# Altium PCB DC_buck_3.3V.PcbDoc
Units mil, origin at the board's own origin, x right, y up, seen from the top; angles counter-clockwise.
Board outline 2455 x 1905 mil, 2 copper layers (Top Layer, Bottom Layer); 36 components, 21 nets, 90 pads, 160 vias.
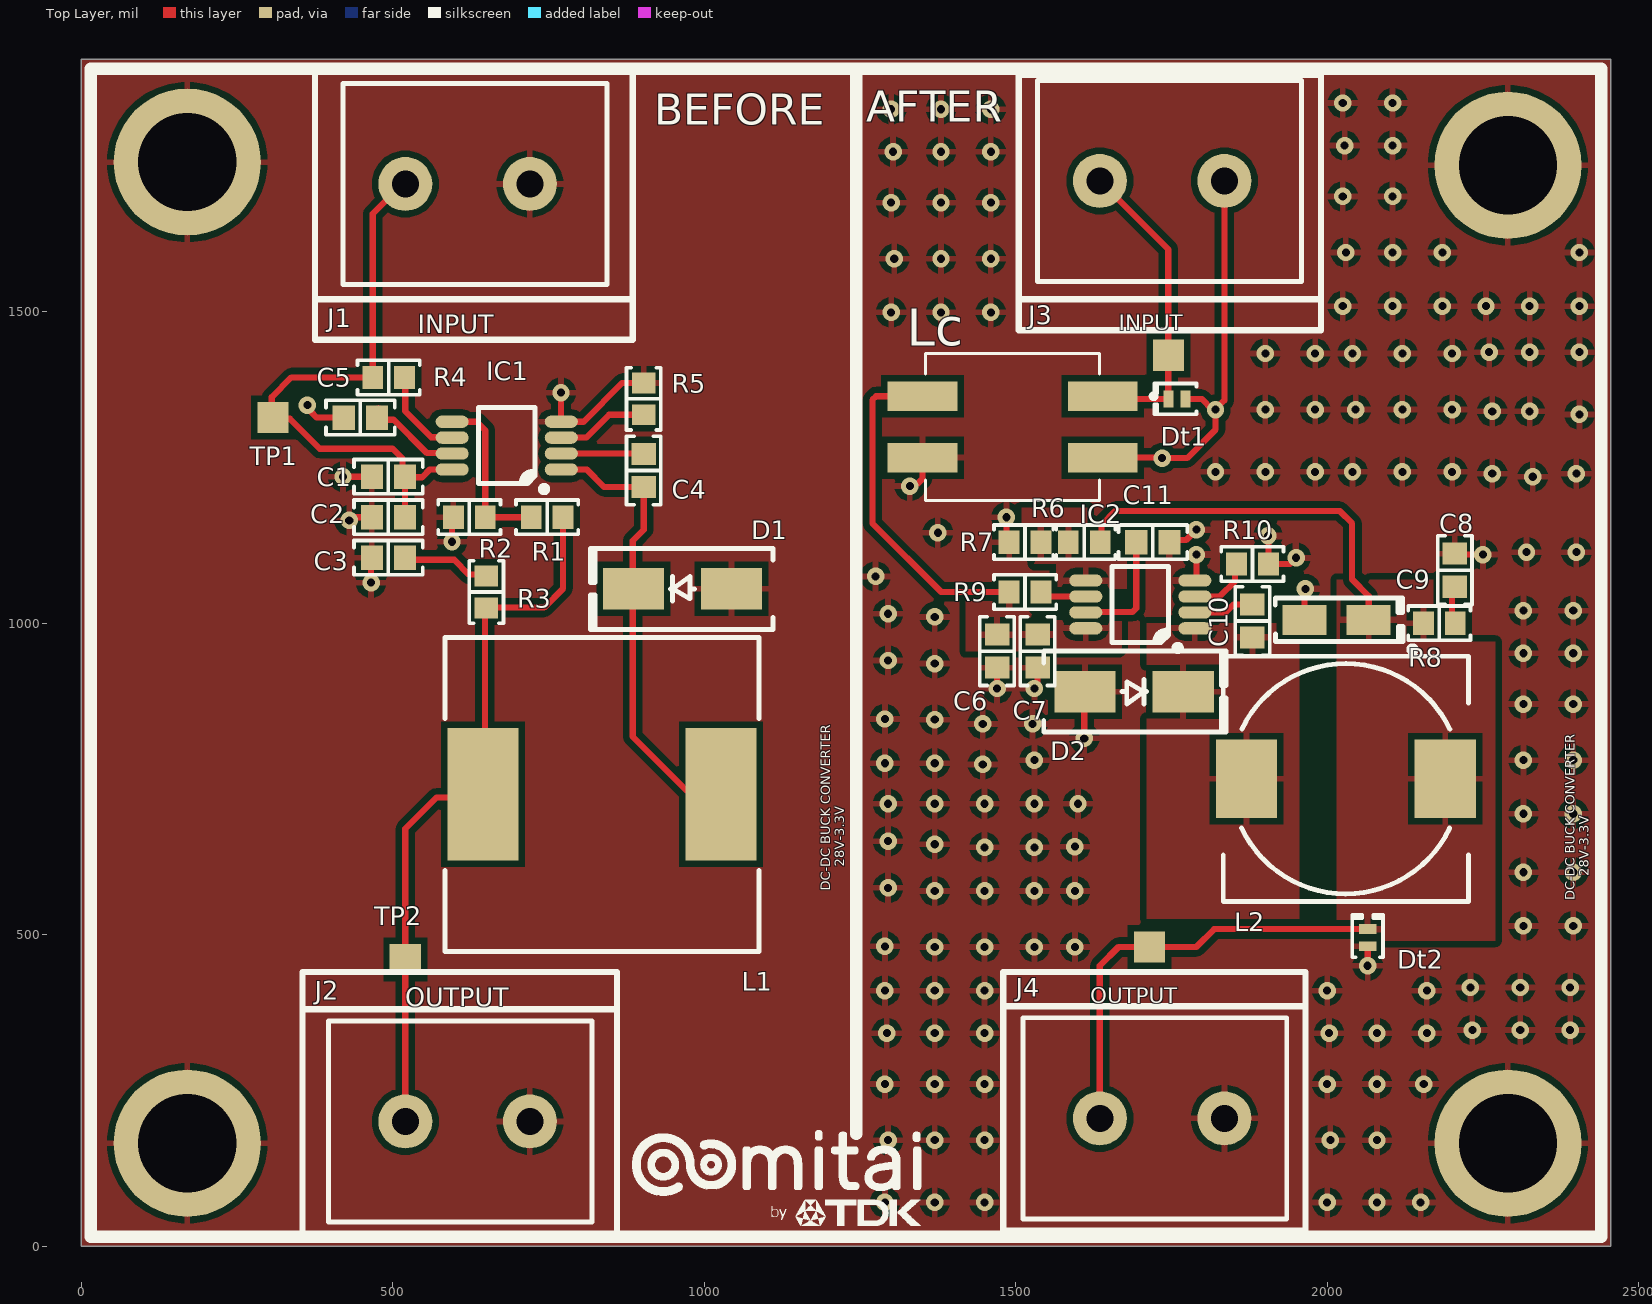
[diagram p0: Top Layer view]
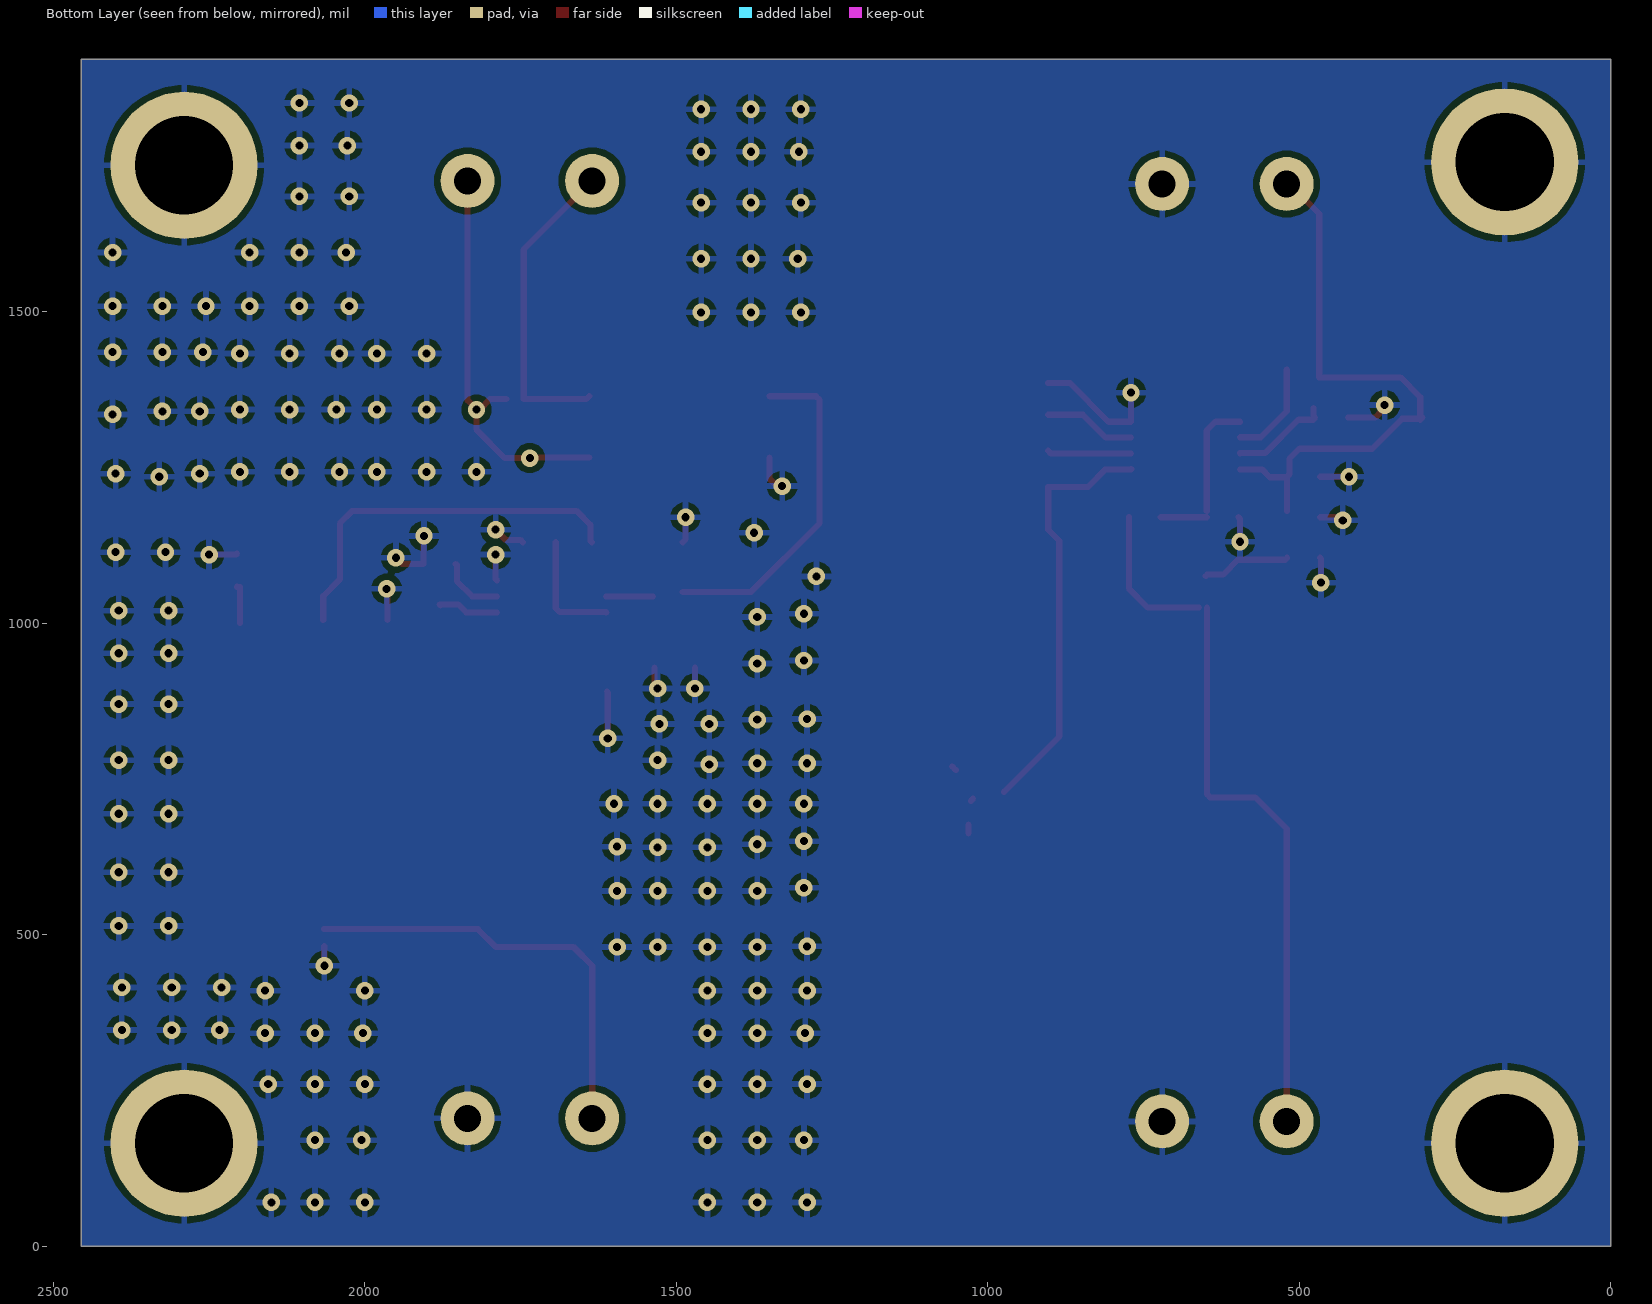
[diagram p1: Bottom Layer view, seen from below]
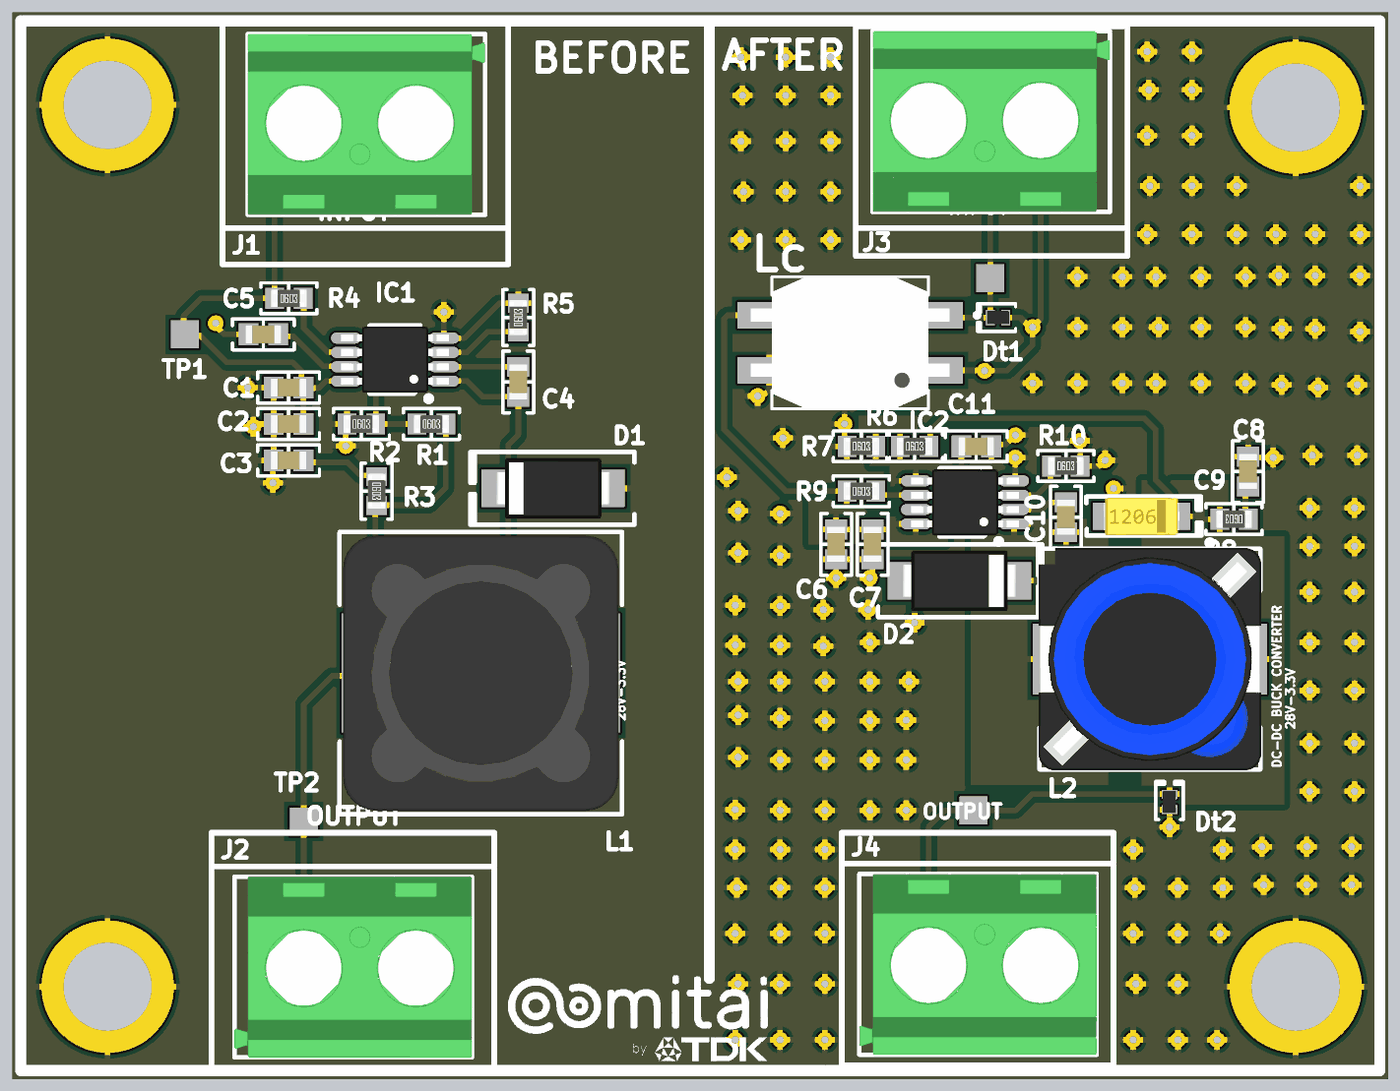
[diagram p2: 3D render of the assembled board from above, using the file's embedded part models]

## Layer stack, top to bottom
Top Solder: solder mask 0.4, Solder Resist, Dk 3.5
Top Layer: signal copper 1.4
Dielectric 1: dielectric 12.6, FR-4, Dk 4.8
Bottom Layer: signal copper 1.4
Bottom Solder: solder mask 0.4, Solder Resist, Dk 3.5

## Board outline
0,0 2455,0 2455,1905 0,1905

## Design rules (kind name [scope] priority, off if disabled: settings)
Clearance [All] p1: gap=10 ignorepadtopadclearanceinfootprint=TRUE except(0: Arc-Hole Track-Hole SMDPad-Hole THPad-Hole Via-Hole Fill-Hole Poly-Hole Region-Hole Text-Hole)
PolygonConnect [All] p1: connectstyle=Relief reliefconductorwidth=10 reliefentries=4 polygonreliefangle="90 Angle" airgapwidth=10
RoutingVias [All] p1: holewidth=13 width=28 viastyle="Through Hole" minholewidth=0 minwidth=24 maxholewidth=18 maxwidth=50
SolderMaskExpansion [All] p1: expansion=4 istentingtop=FALSE
Width [All] p1: maxlimit=10 minlimit=10 preferedwidth=10
30 further rules are at their usual default settings.

## Components (designator, comment, footprint, x,y, rotation, side; value= is the part's Value field where it differs from the comment)
C1 "0.1 µF" "CAP 0603_1608" 492.78,1235 r0 top
C2 "1 µF" "CAP 0603_1608" 492.78,1170 r0 top
C3 "15 µF" "CAP 0603_1608" 492.78,1105 r0 top
C4 "10000 pF" "CAP 0603_1608" 902.78,1245 r270 top
C5 "0.1 µF" "CAP 0603_1608" 447.78,1330 r180 top
C6 "1 µF" "CAP 0603_1608" 1470,955 r90 top
C7 "0.1 µF" "CAP 0603_1608" 1535,955 r90 top
C8 "15 µF" "CAP 0603_1608" 2205,1085 r270 top
C9 "0.1 µF" "CAP POL 1206_3216" 2015,1005 r180 top
C10 "10000 pF" "CAP 0603_1608" 1880,1003.43 r270 top
C11 "0.1 µF" "CAP 0603_1608" 1720,1130 r0 top
D1 "MURA110T3G" "DO214AC SMA" 965,1055 r180 top
D2 "MURA110T3G" "DO214AC SMA" 1690,890 r0 top
Dt1 "PJEC28VV5FN2_R1_00001" 0402 1758.78,1360 r180 top
Dt2 "UCLAMP03351PW.C" 0402 2065,495 r90 top
IC1 "LM5008MMX/NOPB" "TI VSSOP-8 DGK" 682.78,1285 r180 top
IC2 "LM5008MMX/NOPB" "TI VSSOP-8 DGK" 1700,1030 r180 top
J1 "282837-2" "TE 282837-2" 620,1705 r0 top
J2 "282837-2" "TE 282837-2" 620,200 r180 top
J3 "282837-2" "TE 282837-2" 1735,1710 r0 top
J4 "282837-2" "TE 282837-2" 1735,205 r180 top
L1 "68 µH" "BOURNS SRR1280" 835.94,725 r180 top
L2 "68 µH" "TDK SLF10145" 2030,750 r0 top
Lc "B82790C0225N265" FL_B82790C0225N265 1495,1315 r180 top
R1 "320 Ohms" "RES 0603_1608" 747.78,1170 r0 top
R2 "1 kOhms" "RES 0603_1608" 622.78,1170 r0 top
R3 "2 Ohms" "RES 0603_1608" 650,1050 r270 top
R4 "130 kOhms" "RES 0603_1608" 493.37,1394.41 r0 top
R5 "147 kOhms" "RES 0603_1608" 902.78,1360 r90 top
R6 "320 Ohms" "RES 0603_1608" 1610,1130 r0 top
R7 "1 kOhms" "RES 0603_1608" 1515,1130 r0 top
R8 "2 Ohms" "RES 0603_1608" 2180,1000 r180 top
R9 "130 kOhms" "RES 0603_1608" 1515,1050 r0 top
R10 "147 kOhms" "RES 0603_1608" 1880,1095 r0 top
TP1 "TP_1" Testpoint 387.78,1340 r90 top
TP2 "TP_1" Testpoint 510,540 r180 top

## Footprints (in the part's own frame and the unit in brackets; to place one, negate y for a bottom-side part, rotate by r counter-clockwise, add the part's x,y. Pads: shape width x height; smd on the part's side, far side on the other; paste and mask are expansions set on the pad)
0402 [mm] "SODFL, 2-Leads, Body 0.675x1.075mm, IPC Medium Density"
  rect 0.4x0.7 smd: 1(-0.35,0) 2(0.35,0)
  silkscreen extent -0.8,-0.63 0.92,0.63, body extent -0.51,-0.31 0.5,0.3, height 0.45
"BOURNS SRR1280" [mm] "Precision Wire Wound Inductor, 2-Leads, Body 12.50x12.50mm, IPC Medium Density"
  rect 2.9x5.4 smd: 1(-4.85,0) 2(4.85,0)
  silkscreen extent -6.4,-6.4 6.4,6.4, body extent -6.25,-6.25 6.25,6.25, height 7.9
"CAP 0603_1608" [mm] "Chip Capacitor, 2-Leads, Body 1.60x0.80mm, IPC Medium Density"
  rect 0.9x1 smd: 1(-0.675,0) 2(0.675,0)
  silkscreen extent -1.4,-0.7 1.4,0.7, body extent -0.8,-0.41 0.8,0.41, height 0.82
"CAP POL 1206_3216" [mm] "Molded Capacitor, 2-Leads, Body 3.20x1.6mm, IPC Medium Density"
  rect 1.8x1.23 smd: 1(-1.31,0) 2(1.31,0)
  silkscreen extent -3.22,-0.9 2.5,1.32, body extent -1.72,-0.85 1.71,0.85, height 1.7
"DO214AC SMA" [mm] "Molded Diode, 2-Leads, Body 4.30x2.60mm, IPC Medium Density"
  rect 2.5x1.7 smd: 1(-2,0) 2(2,0)
  silkscreen extent -3.68,-1.65 3.75,1.65, body extent -2.6,-1.37 2.6,1.37, height 2.4
FL_B82790C0225N265 [mm]
  rect 2.85x1.2 smd: 1(-3.675,-1.25) 2(3.675,-1.25) 3(3.675,1.25) 4(-3.675,1.25)
  silkscreen extent -5.85,-3 3.55,3, body extent -4.5,-3 4.5,3, height 5.2
"RES 0603_1608" [mm] "Chip Resistor, 2-Leads, Body 1.60x0.80mm, IPC Medium Density"
  rect 0.85x0.95 smd: 1(-0.65,0) 2(0.65,0)
  silkscreen extent -1.27,-0.7 1.27,0.7, body extent -0.8,-0.4 0.8,0.4, height 0.45
"TDK SLF10145" [mm] "Precision Wire Wound Inductor, 2-Leads, Body 10.10x10.10mm, IPC Medium Density"
  rect 2.5x3.2 smd: 1(-4.05,0) 2(4.05,0)
  silkscreen extent -5,-5 5,5, body extent -5.05,-5.05 5.05,5.05, height 4.53
"TE 282837-2" [mm] "Wire to Board Terminal Block Horizontal with Board, 2 Postions, Body 10.76x8.2 mm, Pitch 5.08mm"
  round 2.2 hole 1.1: 1(-2.54,0) 2(2.54,0)
  silkscreen extent -5.08,-4.1 5.68,4.1, body extent -5.08,-4.1 5.68,4.1, height 10.3
Testpoint [mil]
  rect 50x50 smd: TP1(-10,80)
"TI VSSOP-8 DGK" [mm] "TSOP, 8-Leads, Body 3.00x3.00mm, Pitch 0.65mm, IPC Medium Density"
  oval 1.35x0.5 smd: 1(-2.225,0.975) 2(-2.225,0.325) 3(-2.225,-0.325) 4(-2.225,-0.975) 5(2.225,-0.975) 6(2.225,-0.325) 7(2.225,0.325) 8(2.225,0.975)
  silkscreen extent -1.65,-1.55 1.15,1.9, body extent -2.45,-1.5 2.45,1.5, height 1.1

## Part data
C1 C5 C7 C11: library part C0603C104K5RAC7411, "CAP CER 0.1UF 50V X7R 0603", Device Package="0603 (1608 Metric)", Manufacturer=KEMET, Operating Temperature="-55°C ~ 125°C", Supplier Part Number 1=399-C0603C104K5RAC7411CT-ND, Temperature Coefficient=X7R, Tolerance=±10%, Voltage - Rated=50V, Applications="Bypass, Decoupling", Capacitance="0.1 µF", ComponentLink1Description=Datasheet, ComponentLink1URL=https://api.kemet.com/component-edge/download/datasheet/C0603C104K5RAC7411.pdf, ComponentLink2Description="DigiKey Link", ComponentLink2URL=https://www.digikey.com/en/products/detail/kemet/C0603C104K5RAC7411/3317013, lastupdated="01/10/2023 19:09:12", Lifecycle Status=Active, Minimum Order=1, Mounting Type="Surface Mount, MLCC", Package / Case="0603 (1608 Metric)", Packaging=TapeAndReel, Part Number=C0603C104K5RAC7411, Part Status=Active, partid=2233, price=0.01, series="SMD Comm X7R", Size / Dimension="0.063\" L x 0.031\" W (1.60mm x 0.80mm)", Supplier 1=DigiKey, Thickness (Max)="0.035\" (0.90mm)"
C2 C6: library part UMK107ABJ105MAHT, "CAP CER 1UF 50V X5R 0603", Device Package="0603 (1608 Metric)", Manufacturer="Taiyo Yuden", Operating Temperature="-55°C ~ 85°C", Ratings=AEC-Q200, Supplier Part Number 1=587-4958-1-ND, Temperature Coefficient=X5R, Tolerance=±20%, Voltage - Rated=50V, Applications="Automotive, SMPS Filtering", Capacitance="1 µF", ComponentLink1Description=Datasheet, ComponentLink1URL=https://www.yuden.co.jp/productdata/catalog/mlcc_all_hq_e.pdf, ComponentLink2Description="DigiKey Link", ComponentLink2URL=https://www.digikey.com/en/products/detail/taiyo-yuden/UMK107ABJ105MAHT/6563551, lastupdated="01/10/2023 19:09:10", Lifecycle Status=Active, Minimum Order=1, Mounting Type="Surface Mount, MLCC", Package / Case="0603 (1608 Metric)", Packaging=TapeAndReel, Part Number=UMK107ABJ105MAHT, Part Status=Active, partid=3194, price=0.03, series=M, Size / Dimension="0.063\" L x 0.031\" W (1.60mm x 0.80mm)", Supplier 1=DigiKey, Thickness (Max)="0.037\" (0.95mm)"
C3 C8: library part C1608X5R0J156M080AC, "CAP CER 15UF 6.3V X5R 0603", Device Package="0603 (1608 Metric)", Manufacturer="TDK Corporation", Operating Temperature="-55°C ~ 85°C", Supplier Part Number 1=445-8027-1-ND, Temperature Coefficient=X5R, Tolerance=±20%, Voltage - Rated=6.3V, Applications="General Purpose", Capacitance="15 µF", ComponentLink1Description=Datasheet, ComponentLink1URL=https://product.tdk.com/info/en/catalog/datasheets/mlcc_commercial_general_en.pdf?ref_disty=digikey, ComponentLink2Description="DigiKey Link", ComponentLink2URL=https://www.digikey.com/en/products/detail/tdk-corporation/C1608X5R0J156M080AC/2792253, Features="Low ESL", lastupdated="01/10/2023 19:09:11", Lifecycle Status=Active, Minimum Order=1, Mounting Type="Surface Mount, MLCC", Package / Case="0603 (1608 Metric)", Packaging=TapeAndReel, Part Number=C1608X5R0J156M080AC, Part Status=Active, partid=2610, price=0.07, series=C, Size / Dimension="0.063\" L x 0.031\" W (1.60mm x 0.80mm)", Supplier 1=DigiKey, Thickness (Max)="0.039\" (1.00mm)"
C4 C10: library part AC0603KRX7R0BB103, "CAP CER 10000PF 100V X7R 0603", Device Package="0603 (1608 Metric)", Manufacturer=Yageo, Operating Temperature="-55°C ~ 125°C", Ratings=AEC-Q200, Supplier Part Number 1=311-3100-1-ND, Temperature Coefficient=X7R, Tolerance=±10%, Voltage - Rated=100V, Applications=Automotive, Capacitance="10000 pF", ComponentLink1Description=Datasheet, ComponentLink1URL=http://www.yageo.com/NewPortal/_en/search/productDocs.jsp?YageoPartNumber=AC0603KRX7R0BB103, ComponentLink2Description="DigiKey Link", ComponentLink2URL=https://www.digikey.com/en/products/detail/yageo/AC0603KRX7R0BB103/6643086, lastupdated="01/10/2023 19:09:12", Lifecycle Status=Active, Minimum Order=1, Mounting Type="Surface Mount, MLCC", Package / Case="0603 (1608 Metric)", Packaging=TapeAndReel, Part Number=AC0603KRX7R0BB103, Part Status=Active, partid=2218, price=0.01, series=AC, Size / Dimension="0.063\" L x 0.031\" W (1.60mm x 0.80mm)", Supplier 1=DigiKey, Thickness (Max)="0.035\" (0.90mm)"
C9: library part T494A104K035AT, "CAP TANT 0.1UF 10% 35V 1206", Device Package="1206 (3216 Metric)", ESR (Equivalent Series Resistance)=10Ohm, Lifetime @ Temp.="2000 Hrs @ 125°C", Manufacturer=KEMET, Manufacturer Size Code=A, Operating Temperature="-55°C ~ 125°C", Supplier Part Number 1=399-10216-1-ND, Tolerance=±10%, Voltage - Rated="35 V", Capacitance="0.1 µF", ComponentLink1Description=Datasheet, ComponentLink1URL=https://api.kemet.com/component-edge/download/datasheet/T494A104K035AT.pdf, ComponentLink2Description="DigiKey Link", ComponentLink2URL=https://www.digikey.com/en/products/detail/kemet/T494A104K035AT/3759695, Features="General Purpose", Height - Seated (Max)="0.071\" (1.80mm)", lastupdated="26/11/2023 21:00:31", Lifecycle Status=Active, Minimum Order=1, Mounting Type="Surface Mount", Package / Case="1206 (3216 Metric)", Packaging=TapeAndReel, Part Number=T494A104K035AT, Part Status=Active, partid=208, price=0.14, series=T494, Size / Dimension="0.126\" L x 0.063\" W (3.20mm x 1.60mm)", Supplier 1=DigiKey, Type=Molded
D1 D2: "DIODE GEN PURP 100V 2A SMA", Current - Average Rectified (Io)=2A, Current - Reverse Leakage @ Vr="2µA @ 100V", Manufacturer="ON Semiconductor", Operating Temperature - Junction="-65°C ~ 175°C", Package / Case="DO-214AC, SMA", Supplier Device Package=SMA, Supplier Part Number 1=MURA110T3GOSCT-ND, Voltage - DC Reverse (Vr) (Max)=100V, Voltage - Forward (Vf) (Max) @ If="875mV @ 1A", ComponentLink1Description=Datasheet, ComponentLink1URL=//media.digikey.com/pdf/Data%20Sheets/ON%20Semiconductor%20PDFs/MURA105T3-D.pdf, ComponentLink2Description="DigiKey Link", ComponentLink2URL=http://digikey.com/product-detail/en/on-semiconductor/MURA110T3G/MURA110T3GOSCT-ND/964568, Diode Type=Standard, lastupdated="01/10/2023 20:19:19", Lifecycle Status=Active, Minimum Order=1, Mounting Type="Surface Mount", Packaging=TapeAndReel, Part Number=MURA110T3G, Part Status=Active, partid=641, price=0.10, Reverse Recovery Time (trr)=30ns, series=-, Speed="Fast Recovery =< 500ns, > 200mA (Io)", Supplier 1=DigiKey
Dt1: "ESD PROTECTION", Capacitance @ Frequency="5pF @ 1MHz (Max)", Current - Peak Pulse (10/1000µs)="1A (8/20µs)", Device Package="0402 (1005 Metric)", Manufacturer="Panjit International Inc.", Operating Temperature="-55°C ~ 150°C (TJ)", Power Line Protection=No, Supplier Device Package="2-DFN (1x0.6)", Supplier Part Number 1=3757-PJEC28VV5FN2_R1_00001CT-ND, Voltage - Breakdown (Min)=30V, Voltage - Clamping (Max) @ Ipp=50V, Voltage - Reverse Standoff (Typ)="28V (Max)", Applications="General Purpose", Bidirectional Channels=1, ComponentLink2Description="DigiKey Link", ComponentLink2URL=https://www.digikey.com/en/products/detail/panjit-international-inc/PJEC28VV5FN2-R1-00001/15798575, lastupdated="05/12/2023 21:45:21", Lifecycle Status=Active, Minimum Order=1, Mounting Type="Surface Mount", Package / Case="0402 (1005 Metric)", Packaging=TapeAndReel, Part Number=PJEC28VV5FN2_R1_00001, Part Status=Active, partid=11643, price=0.06, series=-, Supplier 1=DigiKey, Type=Zener
Dt2: "3,3V ESD & EOS PROTECTION", Capacitance @ Frequency="4.7pF @ 1MHz", Current - Peak Pulse (10/1000µs)="6A (8/20µs)", Device Package="0402 (1005 Metric)", Manufacturer="Semtech Corporation", Operating Temperature="-40°C ~ 125°C (TA)", Power - Peak Pulse=40W, Power Line Protection=No, Supplier Device Package="2-DFN (1x0.6)", Supplier Part Number 1=600-UCLAMP03351PW.CCT-ND, Voltage - Breakdown (Min)=3.8V, Voltage - Clamping (Max) @ Ipp=6.5V, Voltage - Reverse Standoff (Typ)="3.3V (Max)", Applications="General Purpose", Bidirectional Channels=1, ComponentLink1Description=Datasheet, ComponentLink1URL=https://semtech.my.salesforce.com/sfc/p/#E0000000JelG/a/3n000000qPoT/ng0FFZi8ACANWoaqiIO_glB9bbOFnd4tC4a0u4INqfQ, ComponentLink2Description="DigiKey Link", ComponentLink2URL=https://www.digikey.com/en/products/detail/semtech-corporation/UCLAMP03351PW-C/21371831, lastupdated="05/12/2023 21:45:19", Lifecycle Status=Active, Minimum Order=1, Mounting Type="Surface Mount", Package / Case="0402 (1005 Metric)", Packaging=TapeAndReel, Part Number=UCLAMP03351PW.C, partid=11839, price=0.13, series=µClamp®, Supplier 1=DigiKey, Type=Zener
IC1 IC2: "IC REG BUCK ADJ 350MA 8VSSOP", Current - Output=350mA, Device Package="8-TSSOP, 8-MSOP (0.118\", 3.00mm Width)", Frequency - Switching="50kHz ~ 600kHz", Manufacturer="Texas Instruments", Operating Temperature="-40°C ~ 125°C (TJ)", Supplier Device Package=8-VSSOP, Supplier Part Number 1=296-35288-2-ND, Voltage - Input (Max)=95V, Voltage - Input (Min)=9.5V, Voltage - Output (Max)=75V, Voltage - Output (Min/Fixed)=2.5V, ComponentLink1Description=Datasheet, ComponentLink1URL=http://www.ti.com/general/docs/suppproductinfo.tsp?distId=10&gotoUrl=http%3A%2F%2Fwww.ti.com%2Flit%2Fgpn%2Flm5008, ComponentLink2Description="DigiKey Link", ComponentLink2URL=//digikey.com/product-detail/en/texas-instruments/LM5008MMX-NOPB/296-35288-2-ND/1871803, Function=Step-Down, lastupdated="12/12/2019 10:27:36", Lifecycle Status=0, Minimum Order=1, Mounting Type="Surface Mount", Number of Outputs=1, Output Configuration=Positive, Output Type=Adjustable, Package / Case="8-TSSOP, 8-MSOP (0.118\", 3.00mm Width)", Packaging=TapeAndReel, Part Number=LM5008MMX/NOPB, Part Status=Active, price=1.30, series=-, Supplier 1=DigiKey, Synchronous Rectifier=No, Topology=Buck
J1 J2 J3 J4: "TERM BLK 2P SIDE ENT 5.08MM PCB", Color=Green, Current="13.5 A", Manufacturer="TE Connectivity AMP Connectors", Supplier Part Number 1=A113320-ND, Voltage="300 V", ComponentLink1Description=Datasheet, ComponentLink1URL=https://www.te.com/commerce/DocumentDelivery/DDEController?Action=srchrtrv&DocNm=282837&DocType=Customer+Drawing&DocLang=English, ComponentLink2Description="DigiKey Link", ComponentLink2URL=https://www.digikey.com/en/products/detail/te-connectivity-amp-connectors/282837-2/2187973, Features="Interlocking (Side)", lastupdated="21/06/2022 15:00:23", Lifecycle Status=Active, Mating Orientation="Horizontal with Board", Minimum Order=1, Mounting Type="Through Hole", Number of Levels=1, Packaging=Tray, Part Number=282837-2, Part Status=Active, Pitch="0.200\" (5.08mm)", Positions Per Level=2, price=0.31, series=Buchanan, Supplier 1=DigiKey, Wire Gauge="16-28 AWG", Wire Termination="Screw - Rising Cage Clamp"
L1: library part SRR1280-680M, "FIXED IND 68UH 2.4A 120 MOHM SMD", Current - Saturation=2.3A, Current Rating (Amps)="2.4 A", DC Resistance (DCR)="120mOhm Max", Device Package=Nonstandard, Frequency - Self Resonant=6.5MHz, Inductance Frequency - Test="100 kHz", Manufacturer="Bourns Inc.", Operating Temperature="-40°C ~ 125°C", Q @ Freq="20 @ 2.52MHz", Supplier Part Number 1=SRR1280-680MCT-ND, Tolerance=±20%, ComponentLink1Description=Datasheet, ComponentLink1URL=https://www.bourns.com/docs/Product-Datasheets/SRR1280.pdf, ComponentLink2Description="DigiKey Link", ComponentLink2URL=https://www.digikey.com/en/products/detail/bourns-inc/SRR1280-680M/1970002, Height - Seated (Max)="0.315\" (8.00mm)", Inductance="68 µH", lastupdated="01/10/2023 20:27:20", Lifecycle Status=Active, Material - Core=Ferrite, Minimum Order=1, Mounting Type="Surface Mount", Package / Case=Nonstandard, Packaging=TapeAndReel, Part Number=SRR1280-680M, Part Status=Active, partid=42, price=0.51, series=SRR1280, Shielding=Shielded, Size / Dimension="0.492\" L x 0.492\" W (12.50mm x 12.50mm)", Supplier 1=DigiKey, Type="Drum Core, Wirewound"
L2: library part SLF10145T-680M1R2-PF, "FIXED IND 68UH 1.3A 168 MOHM SMD", Current - Saturation=1.2A, Current Rating (Amps)="1.3 A", DC Resistance (DCR)="168mOhm Max", Device Package=Nonstandard, Inductance Frequency - Test="1 kHz", Manufacturer="TDK Corporation", Operating Temperature="-40°C ~ 105°C", Supplier Part Number 1=445-1987-1-ND, Tolerance=±20%, ComponentLink1Description=Datasheet, ComponentLink1URL=https://product.tdk.com/info/en/catalog/datasheets/inductor_commercial_power_slf10145_en.pdf?ref_disty=digikey, ComponentLink2Description="DigiKey Link", ComponentLink2URL=https://www.digikey.com/en/products/detail/tdk-corporation/SLF10145T-680M1R2-PF/755339, Height - Seated (Max)="0.189\" (4.80mm)", Inductance="68 µH", lastupdated="12/07/2023 20:19:31", Lifecycle Status=Active, Material - Core=Ferrite, Minimum Order=1, Mounting Type="Surface Mount", Package / Case=Nonstandard, Packaging=TapeAndReel, Part Number=SLF10145T-680M1R2-PF, Part Status=Active, partid=81, price=0.44, series=SLF, Shielding=Shielded, Size / Dimension="0.398\" L x 0.398\" W (10.10mm x 10.10mm)", Supplier 1=DigiKey, Type="Drum Core, Wirewound"
Lc: "Common Mode Filter / Choke, 0.005 - 4.7 mH, 200 - 1000 mA", Package="NON STANDARD-4 TDK", Check_prices=https://www.snapeda.com/parts/B82790C0225N265/EPCOS/view-part/?ref=eda, MF=EPCOS, MP=B82790C0225N265, SnapEDA_Link=https://www.snapeda.com/parts/B82790C0225N265/EPCOS/view-part/?ref=snap
R1 R6: library part RT0603DRE07320RL, "RES 320 OHM 0.5% 1/10W 0603", Device Package="0603 (1608 Metric)", Manufacturer=Yageo, Operating Temperature="-55°C ~ 155°C", Power (Watts)="0.1W, 1/10W", Supplier Device Package=0603, Supplier Part Number 1=13-RT0603DRE07320RLCT-ND, Temperature Coefficient=±50ppm/°C, Tolerance=±0.5%, ComponentLink1Description=Datasheet, ComponentLink1URL=https://www.yageo.com/upload/media/product/productsearch/datasheet/rchip/PYu-RT_1-to-0.01_RoHS_L_12.pdf, ComponentLink2Description="DigiKey Link", ComponentLink2URL=https://www.digikey.com/en/products/detail/yageo/RT0603DRE07320RL/7708418, Composition="Thin Film", Height - Seated (Max)="0.022\" (0.55mm)", lastupdated="01/10/2023 19:33:29", Lifecycle Status=Active, Minimum Order=1, Number of Terminations=2, Package / Case="0603 (1608 Metric)", Packaging=TapeAndReel, Part Number=RT0603DRE07320RL, Part Status=Active, partid=62448, price=0.01, Resistance="320 Ohms", series=RT, Size / Dimension="0.063\" L x 0.031\" W (1.60mm x 0.80mm)", Supplier 1=DigiKey
R2 R7: library part AT0603DRD071KL, "RES SMD 1K OHM 0.5% 1/10W 0603", Device Package="0603 (1608 Metric)", Manufacturer=Yageo, Operating Temperature="-55°C ~ 155°C", Power (Watts)="0.1W, 1/10W", Ratings=AEC-Q200, Supplier Device Package=0603, Supplier Part Number 1=YAG2115CT-ND, Temperature Coefficient=±25ppm/°C, Tolerance=±0.5%, ComponentLink1Description=Datasheet, ComponentLink1URL=http://www.yageo.com/documents/recent/PYu-AT_51_RoHS_L_5.pdf, ComponentLink2Description="DigiKey Link", ComponentLink2URL=https://www.digikey.com/en/products/detail/yageo/AT0603DRD071KL/5138634, Composition="Thin Film", Features="Anti-Sulfur, Automotive AEC-Q200, Moisture Resistant", Height - Seated (Max)="0.022\" (0.55mm)", lastupdated="01/10/2023 19:35:39", Lifecycle Status=Active, Minimum Order=1, Number of Terminations=2, Package / Case="0603 (1608 Metric)", Packaging=TapeAndReel, Part Number=AT0603DRD071KL, Part Status=Active, partid=4899, price=0.02, Resistance="1 kOhms", series=AT, Size / Dimension="0.063\" L x 0.031\" W (1.60mm x 0.80mm)", Supplier 1=DigiKey
R3 R8: library part SFR03EZPJ2R0, "SULFUR TOLERANT CHIP RESISTORS", Device Package="0603 (1608 Metric)", Manufacturer="Rohm Semiconductor", Operating Temperature="-55°C ~ 155°C", Power (Watts)="0.1W, 1/10W", Ratings=AEC-Q200, Supplier Device Package=0603, Supplier Part Number 1=511-SFR03EZPJ2R0CT-ND, Temperature Coefficient=±400ppm/°C, Tolerance=±5%, ComponentLink1Description=Datasheet, ComponentLink1URL=https://fscdn.rohm.com/en/products/databook/datasheet/passive/resistor/chip_resistor/sfr-e.pdf, ComponentLink2Description="DigiKey Link", ComponentLink2URL=https://www.digikey.com/en/products/detail/rohm-semiconductor/SFR03EZPJ2R0/16179956, Composition="Thick Film", Features="Anti-Sulfur, Automotive AEC-Q200", Height - Seated (Max)="0.022\" (0.55mm)", lastupdated="01/10/2023 19:33:15", Lifecycle Status=Active, Minimum Order=1, Number of Terminations=2, Package / Case="0603 (1608 Metric)", Packaging=TapeAndReel, Part Number=SFR03EZPJ2R0, Part Status=Active, partid=68512, price=0.01, Resistance="2 Ohms", series=SFR, Size / Dimension="0.063\" L x 0.031\" W (1.60mm x 0.80mm)", Supplier 1=DigiKey
R4 R9: library part CRCW0603130KFKEA, "RES SMD 130K OHM 1% 1/10W 0603", Device Package="0603 (1608 Metric)", Manufacturer="Vishay Dale", Operating Temperature="-55°C ~ 155°C", Power (Watts)="0.1W, 1/10W", Ratings=AEC-Q200, Supplier Device Package=0603, Supplier Part Number 1=541-130KHCT-ND, Temperature Coefficient=±100ppm/°C, Tolerance=±1%, ComponentLink1Description=Datasheet, ComponentLink1URL=http://www.vishay.com/docs/20035/dcrcwe3.pdf, ComponentLink2Description="DigiKey Link", ComponentLink2URL=https://www.digikey.com/en/products/detail/vishay-dale/CRCW0603130KFKEA/1174908, Composition="Thick Film", Features="Automotive AEC-Q200", Height - Seated (Max)="0.020\" (0.50mm)", lastupdated="01/10/2023 19:35:07", Lifecycle Status=Active, Minimum Order=1, Number of Terminations=2, Package / Case="0603 (1608 Metric)", Packaging=CutTape, Part Number=CRCW0603130KFKEA, Part Status=Active, partid=12812, price=0.01, Resistance="130 kOhms", series=CRCW, Size / Dimension="0.061\" L x 0.033\" W (1.55mm x 0.85mm)", Supplier 1=DigiKey
R5 R10: library part RT0603BRD07147KL, "RES SMD 147K OHM 0.1% 1/10W 0603", Device Package="0603 (1608 Metric)", Manufacturer=Yageo, Operating Temperature="-55°C ~ 155°C", Power (Watts)="0.1W, 1/10W", Supplier Device Package=0603, Supplier Part Number 1=YAG4475CT-ND, Temperature Coefficient=±25ppm/°C, Tolerance=±0.1%, ComponentLink1Description=Datasheet, ComponentLink1URL=https://www.yageo.com/upload/media/product/productsearch/datasheet/rchip/PYu-RT_1-to-0.01_RoHS_L_11.pdf, ComponentLink2Description="DigiKey Link", ComponentLink2URL=https://www.digikey.com/en/products/detail/yageo/RT0603BRD07147KL/1072250, Composition="Thin Film", Height - Seated (Max)="0.022\" (0.55mm)", lastupdated="01/10/2023 19:35:22", Lifecycle Status=Active, Minimum Order=1, Number of Terminations=2, Package / Case="0603 (1608 Metric)", Packaging=TapeAndReel, Part Number=RT0603BRD07147KL, Part Status=Active, partid=9271, price=0.03, Resistance="147 kOhms", series=RT, Size / Dimension="0.063\" L x 0.031\" W (1.60mm x 0.80mm)", Supplier 1=DigiKey
TP1 TP2: library part Testpoint

## Free pads (board coordinates)
  round 236.22 hole 157.48: 16(170,165) 16(170,1740) 16(2290,165) 16(2290,1735)
  rect 50x50 smd: TP3(1745,1430) TP4(1715,480)

## Via types
v1: diameter 28, hole 13, Top Layer to Bottom Layer, 160 vias

## Nets (pads, with @x,y where several pads share a name; then routed paths per layer and width w, separated by ;. In a path a pad name is that pad's centre, name@x,y a point inside that pad or via, vN(x,y) a via of type N, cw(c..) or ccw(c..) an arc to the next point about the centre after c; other vN are vias at no path point)
BST: C10.1 IC2.2 | length 99.9
  Top Layer w10: IC2.2 1837.2,1017.2 1850,1030 C10.1 C10.1@1878.43,1028.43
FB: IC2.5 R6.1 R7.2
GND: C1.1 C2.1 C3.1 C5.2 C6.1 C7.1 C8.1 C9.2 C11.2 D1.1 D2.1 Dt2.1 IC1.4 IC2.4 J1.2 J2.1 J4.1 Lc.3 pad.16 R2.1 R5.2 R7.1 R10.2 | length 966.9
  Top Layer w10: v1@367.78,1340 377.78,1330 C5.2 ; v1(430,1165) 435,1170 C2.1 ; v1@430,1235 C1.1 ; v1(465,1065) 465,1103.79 C3.1 ; v1(595,1130.57) 595,1167.81 R2.1 ; v1(770,1370) 770,1323.77 IC1.4 806.17,1323.39 868.37,1385.59 R5.2 ; v1(1330,1220) 1333.44,1223.44 1342.32,1223.44 1350.32,1231.44 Lc.3 ; v1(1470,895) C6.1 ; v1(1485,1170) 1485,1134.41 R7.1 ; v1@1535,895 C7.1 ; v1@1610,820 1610,888.74 D2.1 ; C11.2 1750.01,1133.43 1773.43,1133.43 v1(1790,1150) ; IC2.4 1790,1070.79 v1(1790,1110) ; v1@1905.59,1139.41 R10.2 1940,1095 v1(1950,1105) ; C9.2 v1@1963.43,1056.34 ; v1@2065,455 Dt2.1 ; C8.1 2206.57,1110 v1(2250,1110)
  other v1: 1290,70 1370,70 1450,70 2000,70 2080,70 2150,70 1295,170 1370,170 1450,170 2005,170 2080,170 1290,260 1370,260 1450,260 2000,260 2080,260 2155,260 1293.04,341.69 1370,341.69 1450,341.69 2003.04,341.69 2080,341.69 2160,341.69 2233.04,346.69 2310,346.69 2390,346.69 1290,410 1370,410 1450,410 2000,410 2160,410 2230,415 2310,415 2390,415 2065,450 1370,480 1450,480 1530,480 1595,480 1290,481.09 2315,513.91 2395,513.91 1370,570 1450,570 1530,570 1595,570 1295,575 2315,600 2395,600 1450,640 1530,640 1595,641.09 1370,645 1295,650 2315,693.91 2395,693.91 1295,710 1370,710 1450,710 1530,710 1600,710 1447.05,773.11 1290,775 1370,775 1530,780 2315,780 2395,780 1610,815 1447.05,838.11 1527.05,838.11 1370,845 1290,846.09 2315,870 2395,870 1530,895 1370,935 1295,940 2315,951.69 2395,951.69 1370,1010 1295,1015 2315,1020 2395,1020 1965,1055 1275,1075 2320,1113.91 2400,1113.91 1905,1140 1375,1145 420,1235 2330,1235 2265,1240 2400,1240 1820.66,1242.84 1900.66,1242.84 1980.66,1242.84 2040.66,1242.84 2120.66,1242.84 2200.66,1242.84 2405,1335 2265,1340 2325,1340 1900.66,1342.84 1980.66,1342.84 2045.66,1342.84 2120.66,1342.84 2200.66,1342.84 362.78,1350 1900.66,1432.84 1980.66,1432.84 2040.66,1432.84 2120.66,1432.84 2200.66,1432.84 2260,1435 2325,1435 2405,1435 1300,1498.91 1380,1498.91 1460,1498.91 2025,1508.91 2105,1508.91 2185,1508.91 2255,1508.91 2325,1508.91 2405,1508.91 1305,1585 1380,1585 1460,1585 2030,1595 2105,1595 2185,1595 2405,1595 1300,1675 1380,1675 1460,1675 2025,1685 2105,1685 1303.04,1756.69 1380,1756.69 1460,1756.69 2028.04,1766.69 2105,1766.69 1300,1825 1380,1825 1460,1825 2025,1835 2105,1835
GND_IN: Dt1.1 J3.2 Lc.4 | length 655.8
  Top Layer w10: Lc.4 1734.21,1265.79 v1(1735,1265) 1775,1265 1820.66,1310.66 1820.66,1343.36 1835,1357.7 J3.2 ; Dt1.1 1798.63,1360 v1@1815.79,1342.84
  other v1: 1820.66,1342.84
IN1: Dt1.2 J3.1 Lc.1 pad.TP3 | length 502.6
  Top Layer w10: J3.1 1745,1600 pad.TP3 Dt1.2 1643.9,1360 Lc.1
NetC1_2: C1.2 C2.2 IC1.8 J1.1 R4.1 TP1.TP1 | length 962.1
  Top Layer w10: TP1.TP1@307.03,1330 TP1.TP1@305.58,1330 ; TP1.TP1 TP1.TP1@305.58,1330 ; C2.2@519.36,1180 C1.2 ; J1.1 515.57,1705 467.78,1657.22 R4.1 337.19,1394.41 305.58,1362.8 TP1.TP1@305.58,1330 ; IC1.8 559.4,1246.61 546.93,1234.14 520.22,1234.14 C1.2 ; TP1.TP1@305.58,1326.61 TP1.TP1@305.58,1330 ; TP1.TP1@305.58,1326.61 307.03,1328.06 334.72,1328.06 382.78,1280 499.5,1280 515.67,1263.83 515.67,1238.69 C1.2 ; TP1.TP1@305.58,1326.61 302.19,1330 TP1.TP1@305.58,1330
NetC3_2: C3.2 R3.1 | length 142.8
  Top Layer w10: C3.2 522.79,1101.57 598.5,1101.57 622.16,1077.91 647.68,1077.91 R3.1
NetC4_1: C4.1 IC1.2 | length 134.2
  Top Layer w10: IC1.2 898.41,1272.2 C4.1@902.78,1276.57
NetC4_2: C4.2 D1.2 IC1.1 L1.1 | length 705.5
  Top Layer w10: IC1.1@769.63,1247.36 IC1.1 811.17,1246.61 839.36,1218.43 C4.2 902.78,1150 885,1132.22 885,817.78 L1.1@973.64,729.14 ; L1.1@1023.63,718.26 L1.1@1026.89,715 ; L1.1@1030.94,662.48 L1.1@1030.94,676.63 ; L1.1@1051.03,764.14 L1.1@1056.89,770
NetC5_1: C5.1 IC1.7 | length 160.6
  Top Layer w10: C5.1 477.79,1326.57 501.22,1326.57 554.83,1272.95 594.44,1272.95 IC1.7 ; C5.1@477.08,1329.14 C5.1@477.08,1345
NetC8_2: C8.2 R8.1 | length 57.9
  Top Layer w10: R8.1@2200.59,1000 C8.2@2200.59,1057.8 ; C8.2 C8.2
NetIC1_3: IC1.3 R5.1 | length 147.6
  Top Layer w10: IC1.3 810.58,1297.8 847.19,1334.41 R5.1
NetIC1_5: IC1.5 R1.1 R2.2 | length 262.2
  Top Layer w10: IC1.5 634.4,1323.39 648.37,1309.41 R2.2@648.37,1180 ; R2.2 R1.1
NetIC1_6: IC1.6 R4.2 | length 159.6
  Top Layer w10: R4.2@520,1407.1 520,1340.36 561.82,1298.54 594.44,1298.54 IC1.6
NetJ2_2: J2.2 L1.2 R1.2 R3.2 TP2.TP1 | length 1160.2
  Top Layer w10: J2.2 520,480 520,670 570,720 642.78,720 647.78,725 R3.2@647.78,1025 ; R3.2@660.8,1025 742.78,1025 773.37,1055.59 R1.2
OUT: C9.1 Dt2.2 J4.2 L2.2 pad.TP4 R6.2 R8.2 | length 1313.7
  Top Layer w10: J4.2 1635,450 1665,480 1790,480 1818.78,508.78 Dt2.2 ; R6.2 1637.84,1132.25 1637.84,1157.84 1660,1180 2020,1180 2040,1160 2040,1070 2066.57,1043.43 C9.1
RCL: IC2.3 R10.1 | length 103.4
  Top Layer w10: IC2.3 1827.8,1042.8 1852.16,1067.16 1852.16,1092.75 R10.1
Ron: IC2.6 R9.2 | length 74.6
  Top Layer w10: R9.2@1537.8,1042.8 IC2.6
SW: C10.2 D2.2 IC2.1 L2.1
VCC: C11.1 IC2.7 | length 189.9
  Top Layer w10: IC2.7 1613.15,1017.95 1687.57,1017.95 1693.43,1023.81 C11.1
VIN: C6.2 C7.2 IC2.8 Lc.2 R9.1 | length 546.1
  Top Layer w10: Lc.2 1275.86,1364.21 1270,1358.35 1270,1160 1380,1050 R9.1

## Polygon pours and split planes (outlines as drawn)
GND on Bottom Layer "GND_L02_P011" (solid, pour order 11): 0,1905 2455,1905 2455,-5 2450,0 0,0
GND on Top Layer "GND_L01_P012" (solid, pour order 12): 0,1905 2455,1905 2455,-5 2450,0 0,0
OUT on Top Layer "OUT_L01_P010" (solid, pour order 10): 2015,1070 2170,1070 2170,970 2245,970 2270,970 2270,490 2015,490
SW on Top Layer "SW_L01_P009" (solid, pour order 9): 1917.99,1000 1917.99,970.79 1955,970 1955,965 1955,525 1710,525 1710,550 1710,1000
FB on Top Layer "FB_L01_P008" (solid, pour order 8): 1680,1055 1565,1055 1565,1095 1515,1095 1510,1100 1510,1185 1615,1185 1615,1100 1660,1100 1680,1105
VIN on Top Layer "VIN_L01_P007" (solid, pour order 7): 1670,1005 1535,1005 1515,1025 1515,1095 1420,1095 1420,955 1665,955 1670,960

## Other copper
Top Layer:
  pour cut-out: 1965.2,970.79 2004.8,970.79 2004.8,524.07 1965.2,524.07 1965.2,525

## Silkscreen, mask and mechanical layers (free items; w line width, h text height)
Top Overlay:
  drawing of 52 lines, arcs and shapes, not listed
  text "AFTER" at 1260,1805 h50
  text "BEFORE" at 920,1800 h50
  text "INPUT" at 1665,1470 h25
  text "INPUT" at 540,1465 h30
  text "DC-DC BUCK CONVERTER /       28V-3.3V" at 1225,570 h15 r90
  text "DC-DC BUCK CONVERTER /       28V-3.3V" at 2420,555 h15 r90
  text "OUTPUT" at 1620,390 h25
  text "OUTPUT" at 520,385 h30
Mechanical 1:
  the board outline again, w19.68